# Altium PCB motor_driver.PcbDoc (part 4 of 4)
Units mil, origin at the board's own origin, x right, y up, seen from the top; angles counter-clockwise.
Board outline 2915 x 1500 mil, 2 copper layers (Top Layer, Bottom Layer); 45 components, 39 nets, 213 pads, 173 vias.
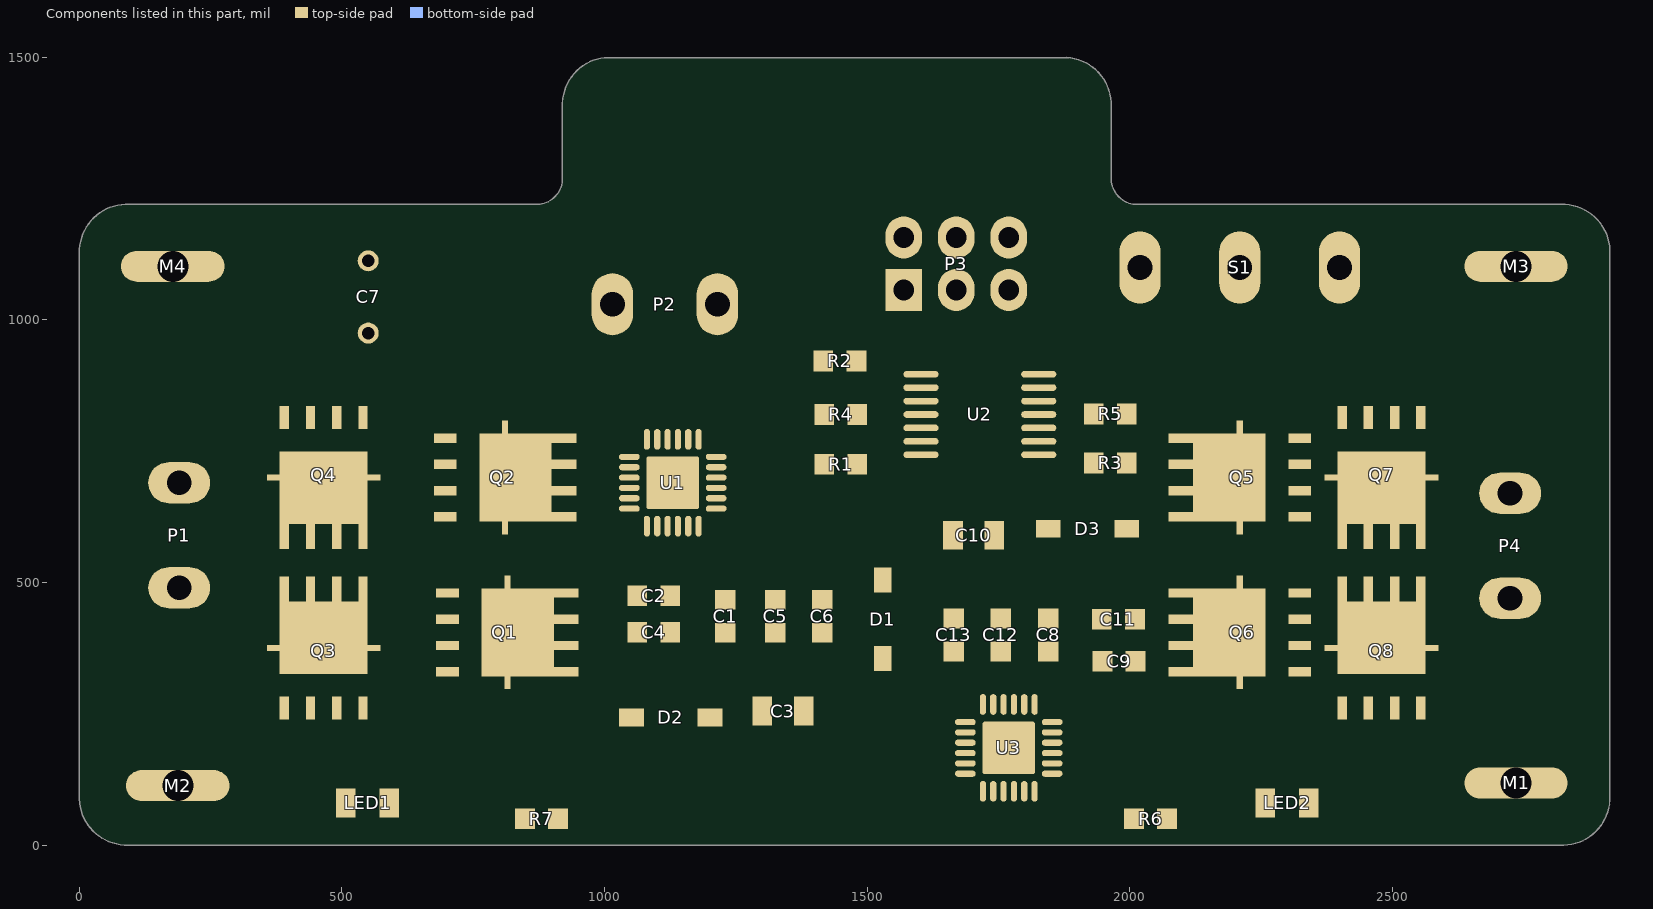
[diagram p4: the components of this part, seen from the top]

## Via types
v1: diameter 22, hole 12, Top Layer to Bottom Layer, tented both sides, 173 vias

## Nets (pads, with @x,y where several pads share a name; then routed paths per layer and width w, separated by ;. In a path a pad name is that pad's centre, name@x,y a point inside that pad or via, vN(x,y) a via of type N, cw(c..) or ccw(c..) an arc to the next point about the centre after c; other vN are vias at no path point) (continued)
copper on no net: (continued)
  Top Layer w1.05: 1828.3,1383.35 1833.55,1383.35 ; 1829.35,1244.75 1841.95,1244.75 ; 1829.35,1245.8 1840.9,1245.8 ; 1829.35,1384.4 1835.65,1384.4 ; 1829.35,1435.85 1838.8,1435.85 ; 1829.35,1436.9 1837.75,1436.9 ; 1830.4,1242.65 1844.05,1242.65 ; 1830.4,1243.7 1843,1243.7 ; 1830.4,1385.45 1836.7,1385.45 ; 1830.4,1408.55 1837.75,1408.55 ; 1830.4,1437.95 1836.7,1437.95 ; 1831.45,1240.55 1846.15,1240.55 ; 1831.45,1241.6 1845.1,1241.6 ; 1831.45,1386.5 1837.75,1386.5 ; 1831.45,1439 1835.65,1439 ; 1832.5,1238.45 1848.25,1238.45 ; 1832.5,1239.5 1847.2,1239.5 ; 1832.5,1387.55 1838.8,1387.55 ; 1832.5,1440.05 1833.55,1440.05 ; 1833.55,1237.4 1850.35,1237.4 ; 1833.55,1388.6 1839.85,1388.6 ; 1833.55,1409.6 1838.8,1409.6 ; 1834.6,1235.3 1847.2,1235.3 ; 1834.6,1236.35 1851.4,1236.35 ; 1834.6,1389.65 1840.9,1389.65 ; 1834.6,1390.7 1841.95,1390.7 ; 1835.65,1234.25 1844.05,1234.25 ; 1835.65,1391.75 1841.95,1391.75 ; 1836.7,1233.2 1841.95,1233.2 ; 1836.7,1392.8 1843,1392.8 ; 1836.7,1393.85 1844.05,1393.85 ; 1837.75,1232.15 1840.9,1232.15 ; 1837.75,1394.9 1844.05,1394.9 ; 1837.75,1395.95 1845.1,1395.95 ; 1837.75,1410.65 1838.8,1410.65 ; 1838.8,1231.1 1839.85,1231.1 ; 1838.8,1397 1845.1,1397 ; 1838.8,1398.05 1846.15,1398.05 ; 1838.8,1399.1 1846.15,1399.1 ; 1839.85,1400.15 1847.2,1400.15 ; 1839.85,1401.2 1847.2,1401.2 ; 1839.85,1402.25 1847.2,1402.25 ; 1840.9,1403.3 1847.2,1403.3 ; 1840.9,1404.35 1848.25,1404.35 ; 1840.9,1405.4 1848.25,1405.4 ; 1840.9,1406.45 1848.25,1406.45 ; 1840.9,1407.5 1848.25,1407.5 ; 1840.9,1408.55 1848.25,1408.55 ; 1841.95,1409.6 1848.25,1409.6 ; 1841.95,1410.65 1848.25,1410.65 ; 1841.95,1411.7 1848.25,1411.7 ; 1841.95,1412.75 1849.3,1412.75 ; 1841.95,1413.8 1849.3,1413.8 ; 1841.95,1414.85 1849.3,1414.85 ; 1841.95,1415.9 1849.3,1415.9 ; 1841.95,1416.95 1849.3,1416.95 ; 1841.95,1418 1849.3,1418 ; 1841.95,1419.05 1849.3,1419.05 ; 1841.95,1420.1 1849.3,1420.1 ; 1841.95,1421.15 1849.3,1421.15 ; 1841.95,1422.2 1849.3,1422.2 ; 1841.95,1423.25 1849.3,1423.25 ; 1841.95,1424.3 1849.3,1424.3 ; 1841.95,1425.35 1849.3,1425.35 ; 1841.95,1426.4 1849.3,1426.4 ; 1841.95,1427.45 1849.3,1427.45 ; 1841.95,1428.5 1849.3,1428.5 ; 1841.95,1429.55 1849.3,1429.55 ; 1841.95,1445.3 1850.35,1445.3 ; 1841.95,1446.35 1850.35,1446.35 ; 1841.95,1447.4 1850.35,1447.4 ; 1841.95,1448.45 1850.35,1448.45 ; 1841.95,1449.5 1850.35,1449.5 ; 1841.95,1450.55 1850.35,1450.55 ; 1841.95,1451.6 1850.35,1451.6 ; 1841.95,1452.65 1850.35,1452.65 ; 1841.95,1453.7 1850.35,1453.7 ; 1841.95,1454.75 1850.35,1454.75 ; 1841.95,1455.8 1850.35,1455.8 ; 1841.95,1456.85 1850.35,1456.85 ; 1841.95,1457.9 1851.4,1457.9 ; 1841.95,1458.95 1852.45,1458.95 ; 1841.95,1460 1852.45,1460 ; 1841.95,1461.05 1851.4,1461.05 ; 1841.95,1462.1 1848.25,1462.1 ; 1841.95,1463.15 1844.05,1463.15 ; 1843,1430.6 1849.3,1430.6 ; 1843,1431.65 1849.3,1431.65 ; 1843,1432.7 1849.3,1432.7 ; 1843,1433.75 1849.3,1433.75 ; 1843,1434.8 1849.3,1434.8 ; 1843,1435.85 1850.35,1435.85 ; 1843,1436.9 1850.35,1436.9 ; 1843,1437.95 1850.35,1437.95 ; 1843,1439 1850.35,1439 ; 1843,1440.05 1850.35,1440.05 ; 1843,1441.1 1850.35,1441.1 ; 1843,1442.15 1850.35,1442.15 ; 1843,1443.2 1850.35,1443.2 ; 1843,1444.25 1850.35,1444.25 ; 1858.75,1391.75 1861.9,1391.75 ; 1858.75,1392.8 1864,1392.8 ; 1858.75,1393.85 1866.1,1393.85 ; 1858.75,1394.9 1866.1,1394.9 ; 1858.75,1395.95 1866.1,1395.95 ; 1858.75,1397 1866.1,1397 ; 1858.75,1398.05 1866.1,1398.05 ; 1858.75,1399.1 1866.1,1399.1 ; 1858.75,1400.15 1866.1,1400.15 ; 1858.75,1401.2 1866.1,1401.2 ; 1858.75,1402.25 1866.1,1402.25 ; 1858.75,1403.3 1866.1,1403.3 ; 1858.75,1404.35 1866.1,1404.35 ; 1858.75,1405.4 1866.1,1405.4 ; 1858.75,1406.45 1866.1,1406.45 ; 1858.75,1407.5 1866.1,1407.5 ; 1858.75,1408.55 1866.1,1408.55 ; 1858.75,1409.6 1866.1,1409.6 ; 1858.75,1410.65 1866.1,1410.65 ; 1858.75,1411.7 1866.1,1411.7 ; 1858.75,1412.75 1866.1,1412.75 ; 1858.75,1413.8 1866.1,1413.8 ; 1858.75,1414.85 1866.1,1414.85 ; 1858.75,1415.9 1866.1,1415.9 ; 1858.75,1416.95 1866.1,1416.95 ; 1858.75,1418 1866.1,1418 ; 1858.75,1419.05 1866.1,1419.05 ; 1858.75,1420.1 1866.1,1420.1 ; 1858.75,1421.15 1866.1,1421.15 ; 1858.75,1422.2 1866.1,1422.2 ; 1858.75,1423.25 1866.1,1423.25 ; 1858.75,1424.3 1866.1,1424.3 ; 1858.75,1425.35 1866.1,1425.35 ; 1858.75,1426.4 1866.1,1426.4 ; 1858.75,1427.45 1866.1,1427.45 ; 1858.75,1428.5 1866.1,1428.5 ; 1858.75,1429.55 1866.1,1429.55 ; 1858.75,1430.6 1866.1,1430.6 ; 1858.75,1431.65 1866.1,1431.65 ; 1858.75,1432.7 1866.1,1432.7 ; 1858.75,1433.75 1866.1,1433.75 ; 1858.75,1434.8 1866.1,1434.8 ; 1858.75,1435.85 1866.1,1435.85 ; 1858.75,1436.9 1866.1,1436.9 ; 1858.75,1437.95 1866.1,1437.95 ; 1858.75,1439 1866.1,1439 ; 1858.75,1440.05 1866.1,1440.05 ; 1858.75,1441.1 1866.1,1441.1 ; 1858.75,1442.15 1866.1,1442.15 ; 1858.75,1443.2 1866.1,1443.2 ; 1858.75,1444.25 1866.1,1444.25 ; 1858.75,1445.3 1866.1,1445.3 ; 1858.75,1446.35 1866.1,1446.35 ; 1858.75,1447.4 1866.1,1447.4 ; 1858.75,1448.45 1866.1,1448.45 ; 1858.75,1449.5 1867.15,1449.5 ; 1858.75,1450.55 1868.2,1450.55 ; 1858.75,1451.6 1868.2,1451.6 ; 1858.75,1452.65 1866.1,1452.65 ; 1858.75,1453.7 1864,1453.7 ; 1858.75,1454.75 1859.8,1454.75 ; 1875.55,1461.05 1886.05,1461.05 ; 1875.55,1462.1 1883.95,1462.1 ; 1875.55,1463.15 1880.8,1463.15 ; 1875.55,1464.2 1877.65,1464.2 ; 1876.6,1377.05 1879.75,1377.05 ; 1876.6,1378.1 1881.85,1378.1 ; 1876.6,1379.15 1883.95,1379.15 ; 1876.6,1380.2 1883.95,1380.2 ; 1876.6,1381.25 1883.95,1381.25 ; 1876.6,1382.3 1883.95,1382.3 ; 1876.6,1383.35 1883.95,1383.35 ; 1876.6,1384.4 1883.95,1384.4 ; 1876.6,1385.45 1883.95,1385.45 ; 1876.6,1386.5 1883.95,1386.5 ; 1876.6,1387.55 1883.95,1387.55 ; 1876.6,1388.6 1883.95,1388.6 ; 1876.6,1389.65 1883.95,1389.65 ; 1876.6,1390.7 1883.95,1390.7 ; 1876.6,1391.75 1883.95,1391.75 ; 1876.6,1392.8 1883.95,1392.8 ; 1876.6,1393.85 1883.95,1393.85 ; 1876.6,1394.9 1883.95,1394.9 ; 1876.6,1395.95 1883.95,1395.95 ; 1876.6,1397 1883.95,1397 ; 1876.6,1398.05 1883.95,1398.05 ; 1876.6,1399.1 1883.95,1399.1 ; 1876.6,1400.15 1883.95,1400.15 ; 1876.6,1401.2 1883.95,1401.2 ; 1876.6,1402.25 1883.95,1402.25 ; 1876.6,1403.3 1883.95,1403.3 ; 1876.6,1404.35 1883.95,1404.35 ; 1876.6,1405.4 1883.95,1405.4 ; 1876.6,1406.45 1883.95,1406.45 ; 1876.6,1407.5 1883.95,1407.5 ; 1876.6,1408.55 1883.95,1408.55 ; 1876.6,1409.6 1883.95,1409.6 ; 1876.6,1410.65 1883.95,1410.65 ; 1876.6,1411.7 1883.95,1411.7 ; 1876.6,1412.75 1883.95,1412.75 ; 1876.6,1413.8 1883.95,1413.8 ; 1876.6,1414.85 1883.95,1414.85 ; 1876.6,1415.9 1883.95,1415.9 ; 1876.6,1416.95 1883.95,1416.95 ; 1876.6,1418 1883.95,1418 ; 1876.6,1419.05 1883.95,1419.05 ; 1876.6,1420.1 1883.95,1420.1 ; 1876.6,1421.15 1883.95,1421.15 ; 1876.6,1422.2 1883.95,1422.2 ; 1876.6,1423.25 1883.95,1423.25 ; 1876.6,1424.3 1883.95,1424.3 ; 1876.6,1425.35 1883.95,1425.35 ; 1876.6,1426.4 1883.95,1426.4 ; 1876.6,1427.45 1883.95,1427.45 ; 1876.6,1428.5 1883.95,1428.5 ; 1876.6,1429.55 1883.95,1429.55 ; 1876.6,1430.6 1883.95,1430.6 ; 1876.6,1431.65 1883.95,1431.65 ; 1876.6,1432.7 1883.95,1432.7 ; 1876.6,1433.75 1883.95,1433.75 ; 1876.6,1434.8 1883.95,1434.8 ; 1876.6,1435.85 1883.95,1435.85 ; 1876.6,1436.9 1883.95,1436.9 ; 1876.6,1437.95 1883.95,1437.95 ; 1876.6,1439 1883.95,1439 ; 1876.6,1440.05 1883.95,1440.05 ; 1876.6,1441.1 1883.95,1441.1 ; 1876.6,1442.15 1883.95,1442.15 ; 1876.6,1443.2 1883.95,1443.2 ; 1876.6,1444.25 1883.95,1444.25 ; 1876.6,1445.3 1883.95,1445.3 ; 1876.6,1446.35 1883.95,1446.35 ; 1876.6,1447.4 1883.95,1447.4 ; 1876.6,1448.45 1883.95,1448.45 ; 1876.6,1449.5 1883.95,1449.5 ; 1876.6,1450.55 1883.95,1450.55 ; 1876.6,1451.6 1883.95,1451.6 ; 1876.6,1452.65 1883.95,1452.65 ; 1876.6,1453.7 1883.95,1453.7 ; 1876.6,1454.75 1883.95,1454.75 ; 1876.6,1455.8 1883.95,1455.8 ; 1876.6,1456.85 1883.95,1456.85 ; 1876.6,1457.9 1885,1457.9 ; 1876.6,1458.95 1886.05,1458.95 ; 1876.6,1460 1887.1,1460 ; 1902.85,1378.1 1907.05,1378.1 ; 1902.85,1379.15 1908.1,1379.15 ; 1902.85,1460 1908.1,1460 ; 1902.85,1461.05 1907.05,1461.05 ; 1903.9,1380.2 1909.15,1380.2 ; 1903.9,1381.25 1910.2,1381.25 ; 1903.9,1458.95 1909.15,1458.95 ; 1903.9,1462.1 1906,1462.1 ; 1904.95,1382.3 1911.25,1382.3 ; 1904.95,1457.9 1910.2,1457.9 ; 1906,1383.35 1912.3,1383.35 ; 1906,1455.8 1912.3,1455.8 ; 1906,1456.85 1911.25,1456.85 ; 1907.05,1384.4 1913.35,1384.4 ; 1907.05,1385.45 1914.4,1385.45 ; 1907.05,1454.75 1913.35,1454.75 ; 1908.1,1386.5 1914.4,1386.5 ; 1908.1,1387.55 1915.45,1387.55 ; 1908.1,1452.65 1914.4,1452.65 ; 1908.1,1453.7 1914.4,1453.7 ; 1909.15,1388.6 1916.5,1388.6 ; 1909.15,1451.6 1915.45,1451.6 ; 1910.2,1389.65 1917.55,1389.65 ; 1910.2,1390.7 1917.55,1390.7 ; 1910.2,1449.5 1917.55,1449.5 ; 1910.2,1450.55 1916.5,1450.55 ; 1911.25,1391.75 1918.6,1391.75 ; 1911.25,1392.8 1919.65,1392.8 ; 1911.25,1447.4 1918.6,1447.4 ; 1911.25,1448.45 1917.55,1448.45 ; 1912.3,1393.85 1919.65,1393.85 ; 1912.3,1394.9 1920.7,1394.9 ; 1912.3,1395.95 1920.7,1395.95 ; 1912.3,1444.25 1920.7,1444.25 ; 1912.3,1445.3 1919.65,1445.3 ; 1912.3,1446.35 1918.6,1446.35 ; 1913.35,1397 1921.75,1397 ; 1913.35,1398.05 1921.75,1398.05 ; 1913.35,1442.15 1921.75,1442.15 ; 1913.35,1443.2 1920.7,1443.2 ; 1914.4,1399.1 1922.8,1399.1 ; 1914.4,1400.15 1922.8,1400.15 ; 1914.4,1401.2 1922.8,1401.2 ; 1914.4,1439 1922.8,1439 ; 1914.4,1440.05 1922.8,1440.05 ; 1914.4,1441.1 1921.75,1441.1 ; 1915.45,1402.25 1923.85,1402.25 ; 1915.45,1403.3 1923.85,1403.3 ; 1915.45,1404.35 1923.85,1404.35 ; 1915.45,1405.4 1924.9,1405.4 ; 1915.45,1434.8 1924.9,1434.8 ; 1915.45,1435.85 1923.85,1435.85 ; 1915.45,1436.9 1923.85,1436.9 ; 1915.45,1437.95 1922.8,1437.95 ; 1916.5,1406.45 1924.9,1406.45 ; 1916.5,1407.5 1924.9,1407.5 ; 1916.5,1408.55 1925.95,1408.55 ; 1916.5,1409.6 1925.95,1409.6 ; 1916.5,1410.65 1925.95,1410.65 ; 1916.5,1411.7 1925.95,1411.7 ; 1916.5,1428.5 1925.95,1428.5 ; 1916.5,1429.55 1925.95,1429.55 ; 1916.5,1430.6 1925.95,1430.6 ; 1916.5,1431.65 1924.9,1431.65 ; 1916.5,1432.7 1924.9,1432.7 ; 1916.5,1433.75 1924.9,1433.75 ; 1917.55,1412.75 1925.95,1412.75 ; 1917.55,1413.8 1925.95,1413.8 ; 1917.55,1414.85 1925.95,1414.85 ; 1917.55,1415.9 1927,1415.9 ; 1917.55,1416.95 1927,1416.95 ; 1917.55,1418 1927,1418 ; 1917.55,1419.05 1927,1419.05 ; 1917.55,1420.1 1927,1420.1 ; 1917.55,1421.15 1927,1421.15 ; 1917.55,1422.2 1927,1422.2 ; 1917.55,1423.25 1927,1423.25 ; 1917.55,1424.3 1927,1424.3 ; 1917.55,1425.35 1925.95,1425.35 ; 1917.55,1426.4 1925.95,1426.4 ; 1917.55,1427.45 1925.95,1427.45

## Polygon pours and split planes (outlines as drawn)
VM on Top Layer "VM_L01_P001" (solid, pour order 1): 1100.6,1070 665,1070 595,1000 505,1000 505,935 545,895 700,895 760,835 760,390 825,325 825,261.21 916.58,260.1 995.04,345.31 992.67,867.37
VM on Top Layer "VM_L01_P034" (solid, pour order 34): 911.54,261.11 1045,127.64 1045,70 1535,70 1545,80 1545,195 1535,205 1165,205 1065,305 1035.36,305 992.5,347.86
VM on Top Layer "VM_L01_P025" (solid, pour order 25): 1345,745 1320,720 1320,680 1340,660 1420,660 1430,670 1430,740 1425,745
"R B" on Top Layer "R_B_L01_P031" (solid, pour order 31): 2423.33,520 2290,420 2290,315 2390,305 2680,305 2700,325 2700,380 2560,520
"R A" on Top Layer "R_A_L01_P029" (solid, pour order 29): 2410,765 2295,740 2295,582.24 2356.77,554.03 2595,520 2640,475 2680,420 2705,395 2780,395 2810,425 2810,525 2745,590 2680,615 2640,630 2500,765
VM on Top Layer "VM_L01_P026" (solid, pour order 26): 2140,790 2075,790 1960,610 1960,565 2075,450 2075,290 2085,280 2255,280 2275,300 2275,770 2255,790
GND on Top Layer "GND_L01_P046" (solid, pour order 46): 19.12,1185.69 23.77,28.86 2880,20 2891.23,1191.14
GND on Top Layer "GND_L01_P043" (solid, pour order 43): 300,975 235,910 90,910 85,905 90,900 90,425 130,385 305,385 460,230 460,60 430,30 40,30 20,60 15,65 15,1180 35,1200 400,1200 480,1120 480,1005 450,975
"L A" on Top Layer "L_A_L01_P016" (solid, pour order 16): 105,615 115,605 210,605 310,705 310,880 290,900 105,900
GND on Top Layer "GND_L01_P040" (solid, pour order 40): 545,1205 545,1050 495,1050 495,930 540,885 580,885 590,875 590,805 550,765 435,765 410,790 410,865 300,975 300,1185 315,1200
GND on Top Layer "GND_L01_P037" (solid, pour order 37): 2450,940 2565,940 2585,920 2585,790 2575,780 2445,780 2430,795 2430,930
GND on Top Layer "GND_L01_P036" (solid, pour order 36): 2395,290 2515,290 2520,285 2520,210 2510,200 2405,200 2390,215 2390,240 2390,280
GND on Top Layer "GND_L01_P007" (solid, pour order 7): 1315,430 1300,415 1300,375 1375,300 1375,215 1520,215 1540,235 1540,390 1500,430
GND on Top Layer "GND_L01_P024" (solid, pour order 24): 500,1160 500,1145 500,1065 500,1060 505,1050 600,1050 650,1100 1105,1100 1170,1035 1170,970 1185,955 1255,955 1275,975 1275,1155 1225,1205 545,1205 510,1170
"L A" on Top Layer "L_A_L01_P018" (solid, pour order 18): 375,325 385,315 590,315 630,330 640,330 721.67,361.67 730,370 730,495 720,505 380,495
"L B" on Top Layer "L_B_L01_P017" (solid, pour order 17): 610,810 540,740 365,740 365,670 235,540 115,540 115,440 115,430 125,410 300,410 300,460 405,565 615,565 625,575 625,630 660,665 720,670 725,805 720,810
no net on Top Layer "NONET_L01_P009" (solid, pour order 9): 490,261.14 490,245 495,240 500,245 500,255
GND on Top Layer "GND_L01_P008" (solid, pour order 8): 377.5,302.5 327.5,252.5 327.5,62.5 367.5,22.5 537.5,22.5 552.5,37.5 552.5,182.5 480,300
GND on Bottom Layer "GND_L02_P044" (solid, pour order 44): 1210,1140 1145,1075 1145,1000 1290,855 2630,855 2660,885 2660,1020 2630,1050 2565,1050 2530,1015 2040,1015 1865,1190 1640,1190 1575,1125 1280,1125 1265,1140
GND on Bottom Layer "GND_L02_P042" (solid, pour order 42): 2455,935 2390,905 2353.89,298.88 2415,195 2490,195 2525,230 2525,590 2620,685 2620,925 2610,935
GND on Bottom Layer "GND_L02_P045" (solid, pour order 45): 28.86,1196.23 28.86,23.77 2880,20 2885,25 2895.88,1185.69
"L A" on Bottom Layer "L_A_L02_P028" (solid, pour order 28): 140,910 90,860 90,610 115,585 295,585 545,335 695,335 705,345 705,510 665,510 265,910
VM on Bottom Layer "VM_L02_P035" (solid, pour order 35): 1380,205 1330,155 1330,75 1335,70 1560,70 1660,170 1660,265 1685,290 1695,500 2150.11,505.11 2180,535 2180,650 2170,660 1730,660 1720,660 1675,660 1560,545 1500,485 1500,220 1485,205
"R B" on Bottom Layer "R_B_L02_P033" (solid, pour order 33): 2675,530 2645.86,424.14 2680,390 2680,280 2670,270 2545,270 2530,285 2530,580 2695,745 2820,745 2850,715 2850,635 2820,605 2790,565
"L B" on Bottom Layer "L_B_L02_P027" (solid, pour order 27): 560,745 560,640 570,630 630,630 735,735 1020,735 1080,795 1080,835 1070,840 1060,840 745,835

## Other copper
Top Layer:
  pour cut-out: 1685.2,112.09 ccw(c1688.38,115.28) 1688.38,110.77 1691.83,110.77 1698.47,112.09 1703.65,115.55 1708.65,113.67 1708.65,108.46 1708.07,107.59 1691.27,105.21 1685.65,101.45 1682.37,96.54 1676.99,94.86 1670,100
  pour cut-out: 2288.11,807.51 ccw(c2291.29,804.32) 2286.79,804.32 2286.79,800.88 ccw(c2286.79,775.86) 2269.1,793.55 2265.21,789.66 2279.1,775.77 cw(c2273.34,770) 2281.49,770 2281.49,573.59 ccw(c2286.58,573.59) 2282.98,570 cw(c2284.26,568.72) 2284.26,570.53 2286.49,570.53 cw(c2294.24,570.53) 2288.76,576.01 2290.41,577.65 cw(c2295,582.24) 2288.51,582.24 2288.51,734 cw(c2305.97,734) 2293.62,746.35 ccw(c2286.62,753.35) 2296.52,753.35 2296.52,785.51 cw(c2316.82,805.82) 2288.11,805.82
  pour cut-out: 1870.68,406.8 1870.68,393.2 1828.66,393.2 1828.66,396.13 ccw(c1826.59,396.13) 1826.59,398.2 1835.18,406.8
  pour cut-out: 1840.89,343.8 1840.89,319 1820.05,319 1820.05,314.38 1858.56,314.38 1858.56,318.71 cw(c1874.38,318.71) 1874.38,334.53 1875.59,334.53 cw(c1875.59,339.44) 1870.68,339.44 1870.68,343.8
  pour cut-out: 1095.74,1070 1085,1070 1085,1040 1098.32,1053.32 1098.32,1065.71
  pour cut-out: 1400,810 1400,800.53 1356.75,800.53 1356.75,808.72 1359.21,808.72
  pour cut-out: 2540.14,288.79 2569.86,288.79 2569.93,294.4 2566.42,298.51 2566.42,300 2540,300
  pour cut-out: 1485,221.24 1485,215 1481.49,211.49 1524,211.49 1524,214.2 1525.92,216.11 1520.8,221.24
  pour cut-out: 1307.44,727.09 1308.49,726.04 1308.49,686.1 1310.84,686.1 1315.41,690.67 1315.41,724.59
  pour cut-out: 2569.86,288.79 2569.86,238.99 2574.86,236.92 2631.83,293.89 2629.92,298.51 2570,300
  pour cut-out: 2292.3,576.34 2285.97,570 2280,570 2280,466.49 2281.49,465 2345,465 2390.14,510.14 2390.14,539.86 2329.03,539.86 2288.92,579.97
  pour cut-out: 2280,465 2331.32,465 2331.46,465.14 2333.04,463.56 2333.04,460.4 2323.91,460.4 2289.5,425.99 2282.72,425.99 2281.49,427.21
  pour cut-out: 941.57,25.73 941.57,23.78 944.73,20.63 1614.91,20.63 1614.91,23.12 1617.52,25.73
  pour cut-out: 2468.35,526.49 2468.7,526.85 2468.7,531.48 2398.52,531.48 2390.14,539.86 2390.14,517.14 2408.7,517.14 2418.05,526.49
  pour cut-out: 2296.52,760.14 2293.62,757.24 2293.62,746.35 2325.29,746.35 2334.08,755.14 2333.54,755.68 2333.54,760.14
  pour cut-out: 2013.75,706.93 2014.22,706.93 2015,707.71 2015,708.18 2010.09,708.18 2009.95,708.03
  pour cut-out: 2013.75,706.93 2015,708.18 2015,715
  pour cut-out: 1952.35,767.07 1952.35,757.75 1956.71,753.39 1926.66,753.39 1926.66,756.1 1924.75,758.01 1930.52,763.78 1944.42,763.78
  pour cut-out: 1991.48,430.47 1977.75,444.21 1974.06,444.21 1972.14,442.29 1972.14,404.32 1958.66,404.32 1958.66,375.68 1973.2,375.68 1973.2,333.12 1975.91,333.12 1977.82,331.2 1986.8,340.18 1986.8,375.68 1990,378.89 1990,385
  pour cut-out: 1843.1,466.45 1843.1,461.2 1838.13,461.2 1838.13,455.68 1933.62,455.68 1933.62,460.68 1933.8,460.68 1933.8,463.18
  pour cut-out: 873.2,75.68 886.8,75.68 886.8,20.63 873.2,20.63
Bottom Layer:
  pour cut-out: 2910,0 2910,-15 2915,-15 2915,-5 2920,0
  pour cut-out: 1701.2,493.57 1716.49,493.75 1719.58,476.79 1723.33,471.17 1730,400 1726.77,307.61 1736.15,298.23 1755.04,301.99 1760.12,314.24 1758.8,320.88 1749.42,330.26 1750,360 1748.58,472.27 1752.92,483.43 1751.79,489.14 1754.41,494.17 1774.45,494.4 1777.64,490.55 1778.77,482.97 1783.57,476.65 1783.57,303.86 1744.57,263.65 1743.71,80.87 1740.18,75.58 1739.6,65.21 1736.3,60.11 1733.48,59.78 1712.5,80.75 1716.53,91.44 1715.21,98.07 1711.45,103.7 1707.38,106.42 1706.01,113.37 1707.33,120 1706.01,126.63 1702.26,132.26 1700,160 1700,210 1701.22,252.05 1707.33,265 1702.26,277.26 1696.63,281.01 1691.49,289.69
  pour cut-out: 1676.78,109.19 1677.74,132.26 1677.74,252.74 1668.49,260.36 1666.49,258.83 1666.49,170 1619.23,120.04 1621.14,115.42 1662.07,112.14 1670.02,104.19 1674.75,104.19
  pour cut-out: 553.51,640 555.41,635.41 551.56,632.62 545,640
  pour cut-out: 590,625 565.41,625.41 562.62,621.56 580,600
  pour cut-out: 655,520 665,505 667.68,495.96 676.72,505 661.72,520
  pour cut-out: 655,520 667.68,507.32 665,510
  pour cut-out: 665,520 665,505 670,500 675,505 676.72,505 676.72,518.28 675,520

## Silkscreen, mask and mechanical layers (free items; w line width, h text height)
Top Overlay:
  drawing of 702 lines, arcs and shapes, not listed
Top Solder:
  drawing of 3368 lines, arcs and shapes, not listed
Mechanical 1:
  lines w10: 90,1220 865,1220 ; 95,1220 ccw(c90,1130) 0,1135 0,95 ccw(c90,90) 85,0 2820,0 ccw(c2825,90) 2915,85 ; 864.48,1220.31 ccw(c870,1270) 920,1270 ; 920,1269.53 920,1415 cw(c1010,1410) 1000.05,1499.59 ; 1000,1499.53 1885,1499.53 ; 1880,1500 cw(c1875,1410) 1965,1415 1965,1275 ; 1965.31,1275.52 ccw(c2015,1270) 2015,1220 ; 2010,1220 2835,1220 ; 2830,1220 cw(c2825,1130) 2915,1125 ; 2915,80 2915,1130
Mechanical 13:
  lines w10: 0,1220 0.47,1220.47